# EAGLE board plytka (EAGLE 7.7.0)
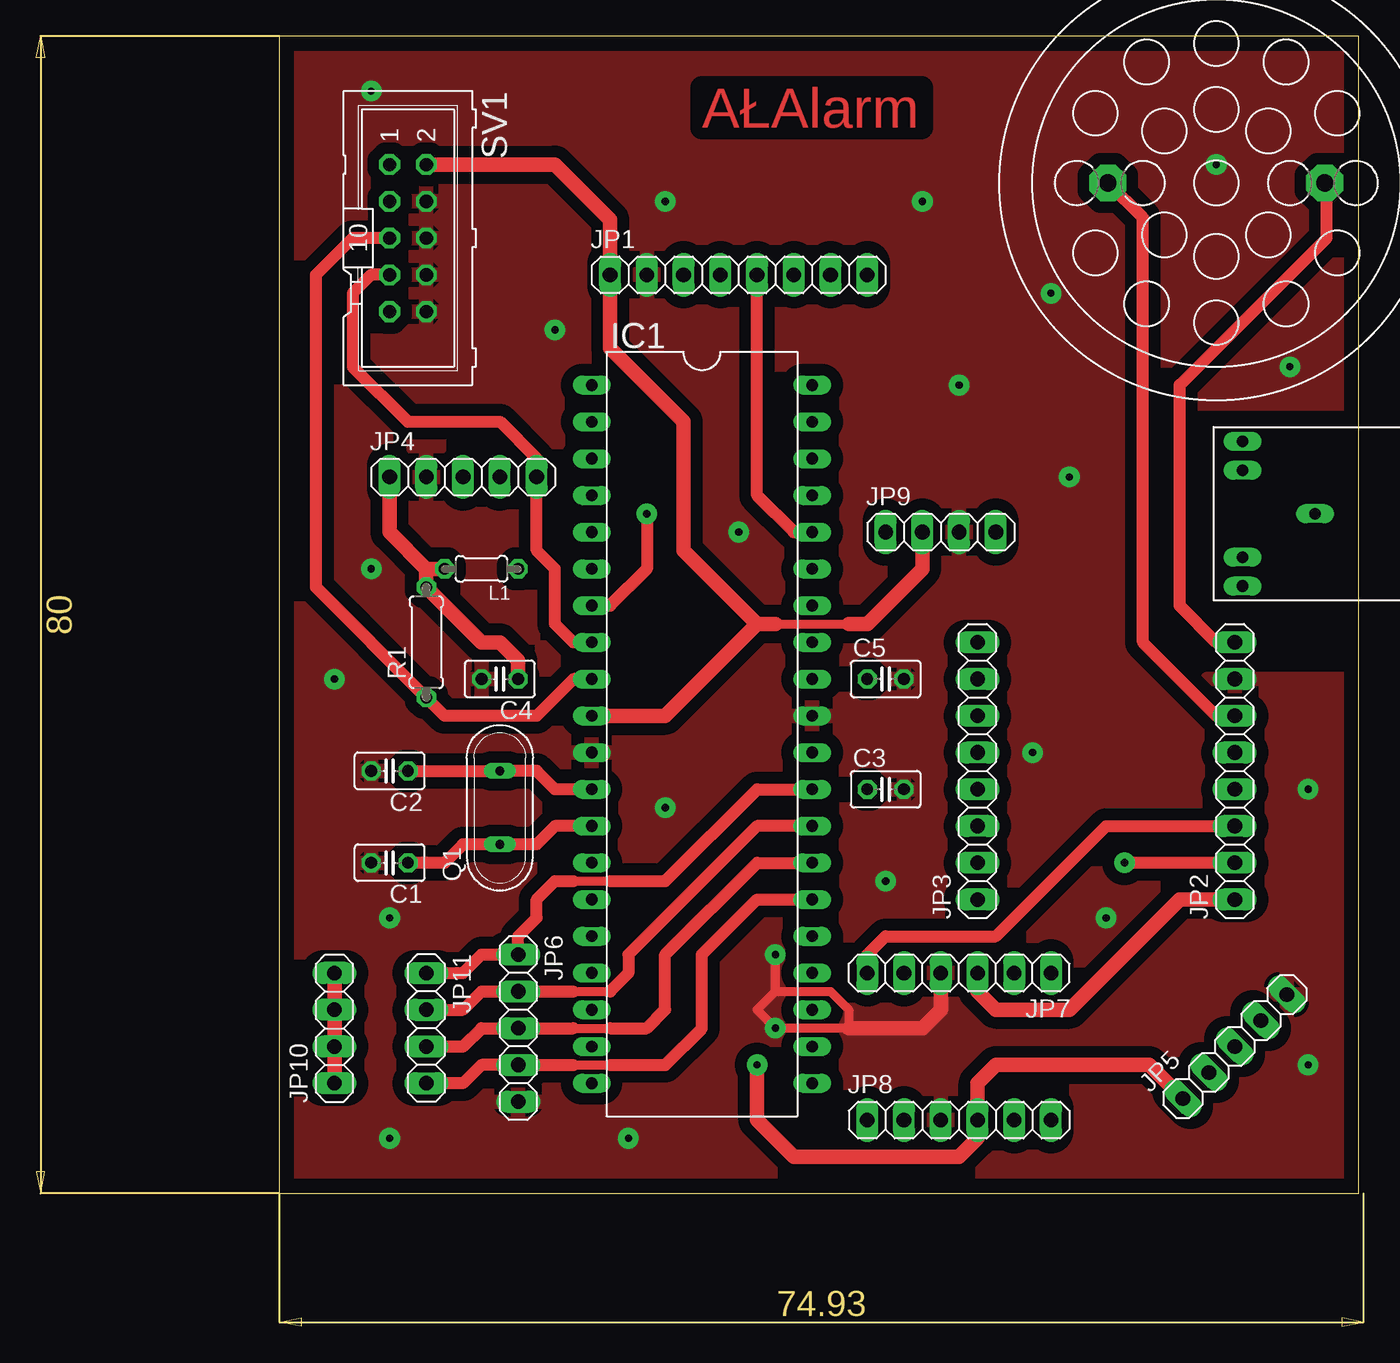
[diagram p0: board, top side]
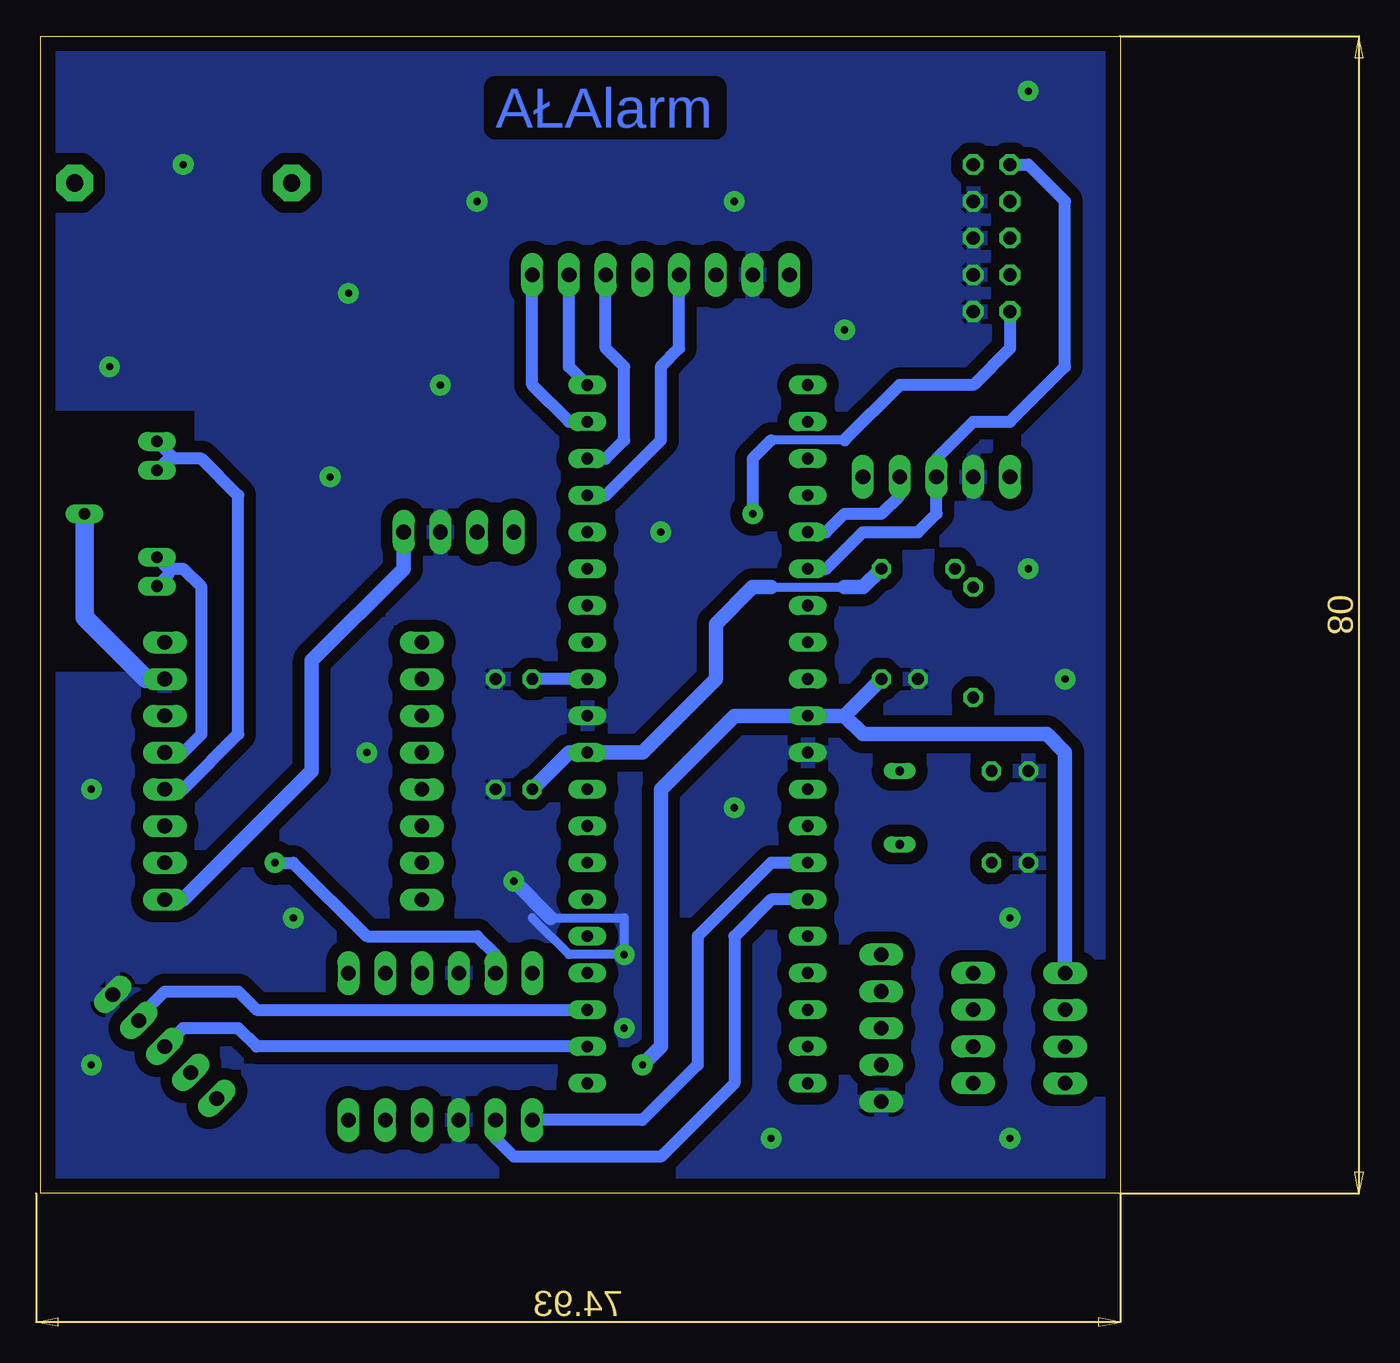
[diagram p1: board, bottom side, seen from below]

Size 74.6 x 80 mm. Coordinates in mm from the lower left corner, seen from the top.
Outline: 0,0 74.6,0 74.6,80 0,80 0,0
Copper layers (1*16): Top 0.035mm / dielectric 1.5mm / Bottom 0.035mm
Design rules "default": minimum track width 10mil, minimum drill 24mil, track to track 8mil, track to pad 8mil, pad to pad 8mil, via to via 8mil, smd to smd 8mil, copper to edge 40mil, drill to drill 8mil, minimum pad ring 10mil, minimum via ring 8mil, stop-mask expansion 4mil, vias tented up to drill 0mil, thermal gap 10mil

## Footprints (pad centres in the part's own frame; a part is rotated, then mirrored left to right if it is on the bottom)
C025-025X050 = drill 0.813 octagon: 1 -1.27,0; 2 1.27,0
DIL40 = drill 0.813 long: 1 -24.13,-7.62; 2 -21.59,-7.62; 3 -19.05,-7.62; 4 -16.51,-7.62; 5 -13.97,-7.62; 6 -11.43,-7.62; 7 -8.89,-7.62; 8 -6.35,-7.62; 9 -3.81,-7.62; 10 -1.27,-7.62; 11 1.27,-7.62; 12 3.81,-7.62; 13 6.35,-7.62; 14 8.89,-7.62; 15 11.43,-7.62; 16 13.97,-7.62; 17 16.51,-7.62; 18 19.05,-7.62; 19 21.59,-7.62; 20 24.13,-7.62; 21 24.13,7.62; 22 21.59,7.62; 23 19.05,7.62; 24 16.51,7.62; 25 13.97,7.62; 26 11.43,7.62; 27 8.89,7.62; 28 6.35,7.62; 29 3.81,7.62; 30 1.27,7.62; 31 -1.27,7.62; 32 -3.81,7.62; 33 -6.35,7.62; 34 -8.89,7.62; 35 -11.43,7.62; 36 -13.97,7.62; 37 -16.51,7.62; 38 -19.05,7.62; 39 -21.59,7.62; 40 -24.13,7.62
1X08 = drill 1.016 long: 1 -8.89,0; 2 -6.35,0; 3 -3.81,0; 4 -1.27,0; 5 1.27,0; 6 3.81,0; 7 6.35,0; 8 8.89,0
1X05 = drill 1.016 long: 1 -5.08,0; 2 -2.54,0; 3 0,0; 4 2.54,0; 5 5.08,0
1X06 = drill 1.016 long: 1 -6.35,0; 2 -3.81,0; 3 -1.27,0; 4 1.27,0; 5 3.81,0; 6 6.35,0
1X04 = drill 1.016 long: 1 -3.81,0; 2 -1.27,0; 3 1.27,0; 4 3.81,0
0204/5 = drill 0.813 octagon: 1 -2.54,0; 2 2.54,0
QS = drill 0.61 long: 1 -2.54,0; 2 2.54,0
0207/7 = drill 0.813 octagon: 1 -3.81,0; 2 3.81,0
AL30P = drill 1.194 pad 2.54 octagon: 1 -7.493,0; 2 7.493,0
ML10 = drill 0.914 octagon: 1 -5.08,-1.27; 2 -5.08,1.27; 3 -2.54,-1.27; 4 -2.54,1.27; 5 0,-1.27; 6 0,1.27; 7 2.54,-1.27; 8 2.54,1.27; 9 5.08,-1.27; 10 5.08,1.27
STEREO_P = drill 0.8 long: GND 0,-3; L_A -5,2; L_B -3,2; R_A 5,2; R_B 3,2

## Placement (x,y rotation side)
C1  22pF  [C025-025X050]  7.62,22.86 180 top
C2  22pF  [C025-025X050]  7.62,29.21 180 top
C3  100nF  [C025-025X050]  41.91,27.94 0 top
C4  100nF  [C025-025X050]  15.24,35.56 180 top
C5  100nF  [C025-025X050]  41.91,35.56 0 top
IC1  MEGA32-P  [DIL40]  29.21,31.75 270 top
JP1  OLED SSD1306  [1X08]  31.75,63.5 0 top
JP2  DFPlayer MP3  [1X08]  66.04,29.21 90 top
JP3  [1X08]  48.26,29.21 90 top
JP4  MAX7219  [1X05]  12.7,49.53 0 top
JP5  RTC DS1307  [1X05]  66.04,10.16 45 top
JP6  KEYBOARD  [1X05]  16.51,11.43 270 top
JP7  [1X06]  46.99,15.24 180 top
JP8  [1X06]  46.99,5.08 0 top
JP9  [1X04]  45.72,45.72 0 top
JP10  [1X04]  3.81,11.43 90 top
JP11  [1X04]  10.16,11.43 270 top
L1  10uH  [0204/5]  13.97,43.18 180 top
Q1  16 MHz  [QS]  15.24,26.67 90 top
R1  10k  [0207/7]  10.16,38.1 90 top
SP2  AL30P  [AL30P]  64.77,69.85 180 top
SV1  KANDA ISP  [ML10]  8.89,66.04 270 top
U$1  STEREO_D  [STEREO_P]  68.58,46.99 90 top

## Library data of the parts
C1-C5 L1 R1 = resistor
IC1 = atmel; MPN: ATMEGA16-16PU; OC_FARNELL: 9171142; OC_NEWARK: 01M6885
JP1-JP11 = pinhead
Q1 = special
SP2 = buzzer; OC_FARNELL: unknown; OC_NEWARK: unknown
SV1 = con-ml; OC_FARNELL: unknown; OC_NEWARK: unknown
U$1 = forAnia

## Nets
3V3: JP2.1 JP7.3 JP9.4
AVCC: C3.1 IC1.30 L1.1
CLK: IC1.8 JP4.5 SV1.7
CS: IC1.5 JP4.4
D/C: IC1.40 JP1.7
DIN: IC1.6 JP4.3 SV1.1
GND: C1.2 C2.2 C3.2 C4.2 C5.2 IC1.11 IC1.31 JP1.2 JP2.7 JP4.2 JP5.5 JP6.5 JP7.4 JP8.3 JP9.3 SV1.4 SV1.6 SV1.8 SV1.10 U$1.GND
KEY1: IC1.29 JP6.1 JP11.1
KEY2: IC1.28 JP6.2 JP11.2
KEY3: IC1.27 JP6.3 JP11.3
KEY4: IC1.26 JP6.4 JP11.4
L: JP2.5 U$1.L_A U$1.L_B
MISO: IC1.7 SV1.9
N$2: C5.1 IC1.32
N$4: JP2.8 SP2.1
N$5: JP2.6 SP2.2
N$9: IC1.37 JP1.4
N$10: IC1.38 JP1.6
N$11: IC1.36 JP1.5
R: JP2.4 U$1.R_A U$1.R_B
RST: IC1.9 R1.1 SV1.5
RST_SSD: IC1.39 JP1.8
RX: JP2.2 JP7.5
RXD: IC1.15 JP8.2
SCL: IC1.22 JP5.3
SDA: IC1.23 JP5.4
TX: JP2.3 JP7.6
TXD: IC1.14 JP8.1
VCC: C4.1 IC1.10 JP1.1 JP4.1 JP5.1 JP8.4 JP9.2 JP10.1 JP10.2 JP10.3 JP10.4 L1.2 R1.2 SV1.2
XTAL1: C1.1 IC1.13 Q1.1
XTAL2: C2.1 IC1.12 Q1.2

## Tracks (layer width: path | path; a pad name or v marks a point on that pad's centre or on a via)
3V3
  Top 1.016: JP7.3 48.26,13.97 49.53,12.7 54.61,12.7 62.23,20.32 JP2.1
  Bottom 1.016: JP2.1 64.77,20.32 55.88,29.21 55.88,36.83 49.53,43.18 JP9.4
AVCC
  Bottom 0.61: 24.13,41.91 19.05,41.91
  Bottom 1.016: C3.1 38.1,30.48 IC1.30 33.02,30.48 27.94,35.56 27.94,39.37 25.4,41.91 24.13,41.91 | 19.05,41.91 17.78,41.91 L1.1
CLK
  Top 0.813: SV1.7 6.35,63.5 5.08,62.23 5.08,57.15 8.89,53.34 15.24,53.34 17.78,50.8 JP4.5 17.78,44.45 19.05,43.18 19.05,39.37 20.32,38.1 IC1.8
CS
  Bottom 0.813: IC1.5 20.32,45.72 19.05,46.99 16.51,46.99 15.24,48.26 JP4.4
D/C
  Bottom 0.813: IC1.40 38.1,57.15 JP1.7
DIN
  Bottom 0.813: SV1.1 6.35,71.12 3.81,68.58 3.81,57.15 7.62,53.34 10.16,53.34 12.7,50.8 JP4.3 12.7,46.99 13.97,45.72 17.78,45.72 20.32,43.18 IC1.6
GND  (via drill 0.5 pad 1.42)
  Top 0.61: 34.29,13.97 38.1,13.97 39.37,12.7 39.37,11.43 v34.29,11.43 33.02,12.7 34.29,13.97 | 34.29,13.97 v34.29,16.51
  Top 1.016: JP7.4 45.72,12.7 44.45,11.43 39.37,11.43
  Bottom 0.61: 39.37,19.05 34.29,19.05 v34.29,16.51 38.1,16.51 40.64,19.05
  Bottom 1.016: v41.91,21.59 39.37,19.05
  Bottom 1.27: U$1.GND 71.58,39.83 67.31,35.56 JP2.7
  other vias: 6.35,76.2 26.67,68.58 44.45,68.58 53.34,62.23 46.99,55.88 54.61,49.53 64.77,71.12 69.85,57.15 71.12,27.94 71.12,8.89 24.13,3.81 7.62,3.81 7.62,19.05 3.81,35.56 26.67,26.67 52.07,30.48 31.75,45.72 19.05,59.69 6.35,43.18 57.15,19.05
  pour Top (isolate 0.813): 0,80.01 74.93,80.01 74.93,54.61 63.5,54.61 63.5,35.56 74.93,35.56 74.93,0 0,0
  pour Bottom (isolate 0.813): 0,80.01 74.93,80.01 74.93,54.61 63.5,54.61 63.5,35.56 74.93,35.56 74.93,0 0,0
KEY1
  Top 0.61: 20.32,21.59 22.86,21.59
  Top 0.813: 20.32,21.59 19.05,21.59 17.78,20.32 17.78,19.05 16.51,17.78 JP6.1 13.97,16.51 12.7,15.24 JP11.1 | 22.86,21.59 26.67,21.59 33.02,27.94 IC1.29
KEY2
  Top 0.61: 20.32,13.97 22.86,13.97
  Top 0.813: IC1.28 33.02,25.4 24.13,16.51 24.13,15.24 22.86,13.97 | 20.32,13.97 JP6.2 13.97,13.97 12.7,12.7 JP11.2
KEY3
  Top 0.61: 20.32,11.43 22.86,11.43
  Top 0.813: 20.32,11.43 JP6.3 13.97,11.43 12.7,10.16 JP11.3 | 22.86,11.43 25.4,11.43 26.67,12.7 26.67,16.51 33.02,22.86 IC1.27
KEY4
  Top 0.61: 20.32,8.89 22.86,8.89
  Top 0.813: IC1.26 33.02,20.32 29.21,16.51 29.21,11.43 26.67,8.89 22.86,8.89 | 20.32,8.89 JP6.4 13.97,8.89 12.7,7.62 JP11.4
L
  Bottom 0.813: 65.77,43.18 64.77,43.18 63.5,41.91 63.5,31.75 64.77,30.48 JP2.5 | 65.77,43.18 U$1.L_B | 65.77,43.18 65.77,42.8 U$1.L_A
MISO  (via drill 0.5 pad 1.42)
  Top 0.813: v25.4,46.99 25.4,43.18 22.86,40.64 IC1.7
  Bottom 0.61: 19.05,52.07 24.13,52.07
  Bottom 0.813: SV1.9 7.62,58.42 10.16,55.88 15.24,55.88 19.05,52.07 | 24.13,52.07 25.4,50.8 v25.4,46.99
N$2
  Bottom 0.813: IC1.32 C5.1
N$4
  Top 0.813: JP2.8 64.77,38.1 62.23,40.64 62.23,55.88 72.39,66.04 72.39,69.72 SP2.1
N$5
  Top 0.813: JP2.6 64.77,33.02 59.69,38.1 59.69,67.44 SP2.2
N$9
  Bottom 0.813: IC1.37 35.56,48.26 31.75,52.07 31.75,57.15 30.48,58.42 JP1.4
N$10
  Bottom 0.813: IC1.38 35.56,50.8 34.29,52.07 34.29,57.15 35.56,58.42 JP1.6
N$11
  Top 0.813: IC1.36 35.56,45.72 33.02,48.26 JP1.5
R
  Bottom 0.813: JP2.4 64.77,27.94 60.96,31.75 60.96,48.26 63.5,50.8 65.39,50.8 | 65.39,50.8 U$1.R_A | 65.39,50.8 65.77,50.8 U$1.R_B
RST
  Top 0.813: IC1.9 20.32,35.56 17.78,33.02 11.43,33.02 R1.1 2.54,41.91 2.54,63.5 5.08,66.04 SV1.5
RST_SSD
  Bottom 0.813: IC1.39 38.1,53.34 40.64,55.88 JP1.8
RX  (via drill 0.5 pad 1.42)
  Top 0.813: JP2.2 v58.42,22.86
  Bottom 0.813: v58.42,22.86 57.15,22.86 52.07,17.78 44.45,17.78 43.18,16.51 JP7.5
RXD
  Bottom 0.813: IC1.15 24.13,20.32 26.67,17.78 26.67,7.62 31.75,2.54 41.91,2.54 43.18,3.81 JP8.2
SCL
  Bottom 0.813: IC1.22 59.69,10.16 60.96,11.43 64.77,11.43 JP5.3
SDA
  Bottom 0.813: JP5.4 67.84,12.17 66.04,13.97 60.96,13.97 59.69,12.7 IC1.23
TX
  Top 0.813: JP7.6 40.64,16.51 41.91,17.78 49.53,17.78 57.15,25.4 JP2.3
TXD
  Bottom 0.813: IC1.14 24.13,22.86 29.21,17.78 29.21,8.89 33.02,5.08 JP8.1
VCC  (via drill 0.5 pad 1.42)
  Top 0.61: 34.29,39.37 39.37,39.37
  Top 1.016: JP5.1 60.13,8.89 49.53,8.89 48.26,7.62 JP8.4 48.26,3.81 46.99,2.54 35.56,2.54 33.02,5.08 v33.02,8.89 | JP10.1 JP10.2 JP10.3 JP10.4 | IC1.10 26.67,33.02 33.02,39.37 | 33.02,39.37 34.29,39.37 | 39.37,39.37 40.64,39.37 44.45,43.18 JP9.2 | L1.2 10.16,43.18 | 10.16,43.18 7.62,45.72 JP4.1 | 10.16,43.18 R1.2 13.97,38.1 15.24,38.1 16.51,36.83 C4.1 | SV1.2 19.05,71.12 22.86,67.31 JP1.1 22.86,58.42 27.94,53.34 27.94,44.45 33.02,39.37
  Bottom 1.016: 19.05,33.02 IC1.10 26.67,33.02 31.75,27.94 31.75,10.16 v33.02,8.89 | 19.05,33.02 C4.1 | 19.05,33.02 17.78,31.75 5.08,31.75 3.81,30.48 JP10.4
XTAL1
  Top 0.813: IC1.13 19.05,25.4 17.78,24.13 Q1.1 12.7,24.13 11.43,22.86 C1.1
XTAL2
  Top 0.813: IC1.12 19.05,27.94 17.78,29.21 Q1.2 C2.1

## Text on the board
Top: AŁAlarm
Bottom: AŁAlarm